# EAGLE board adapter (EAGLE 5.10)
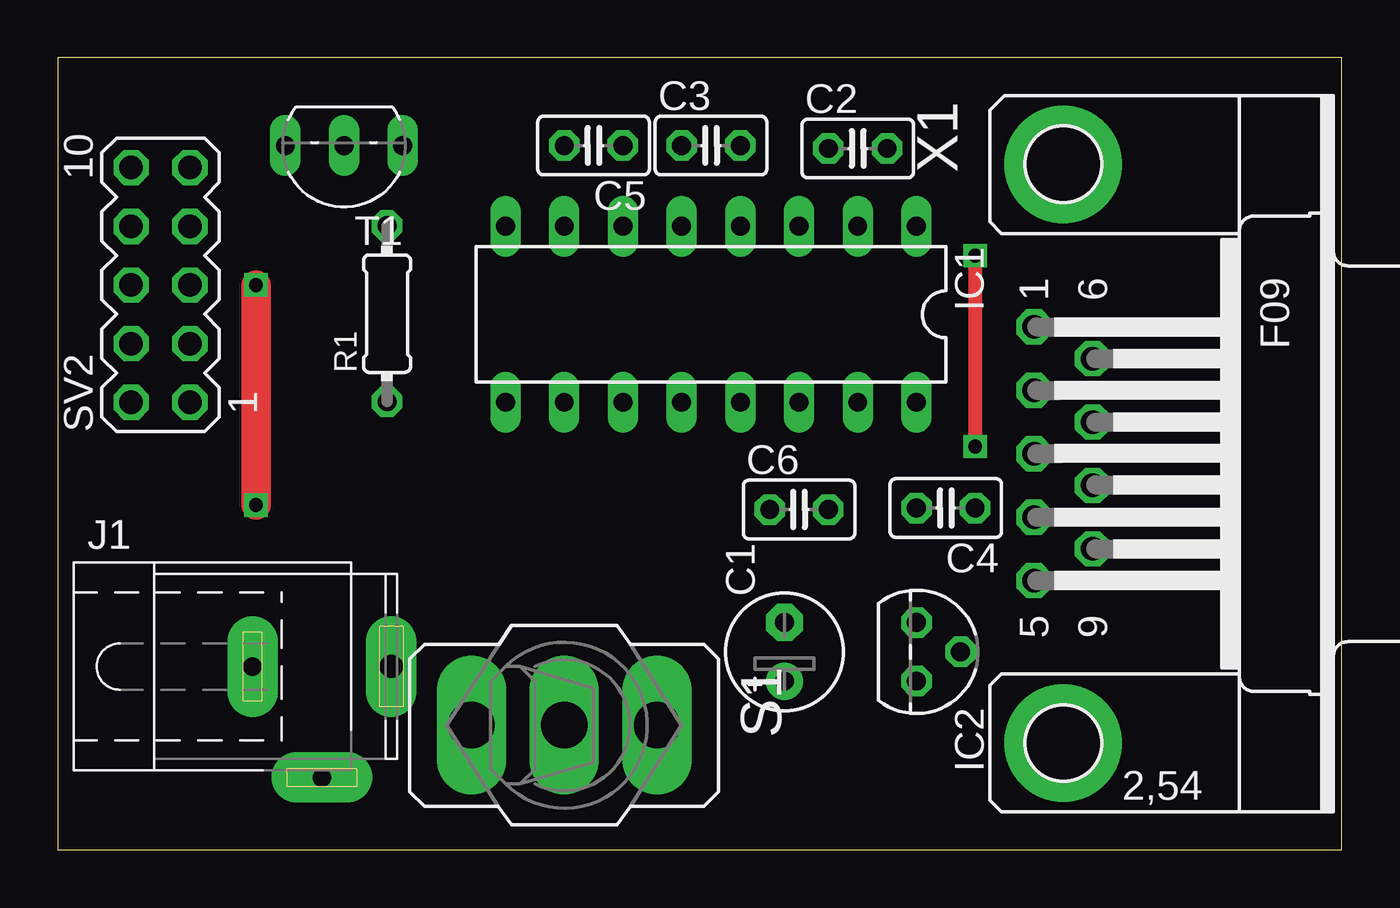
[diagram p0: board, top side]
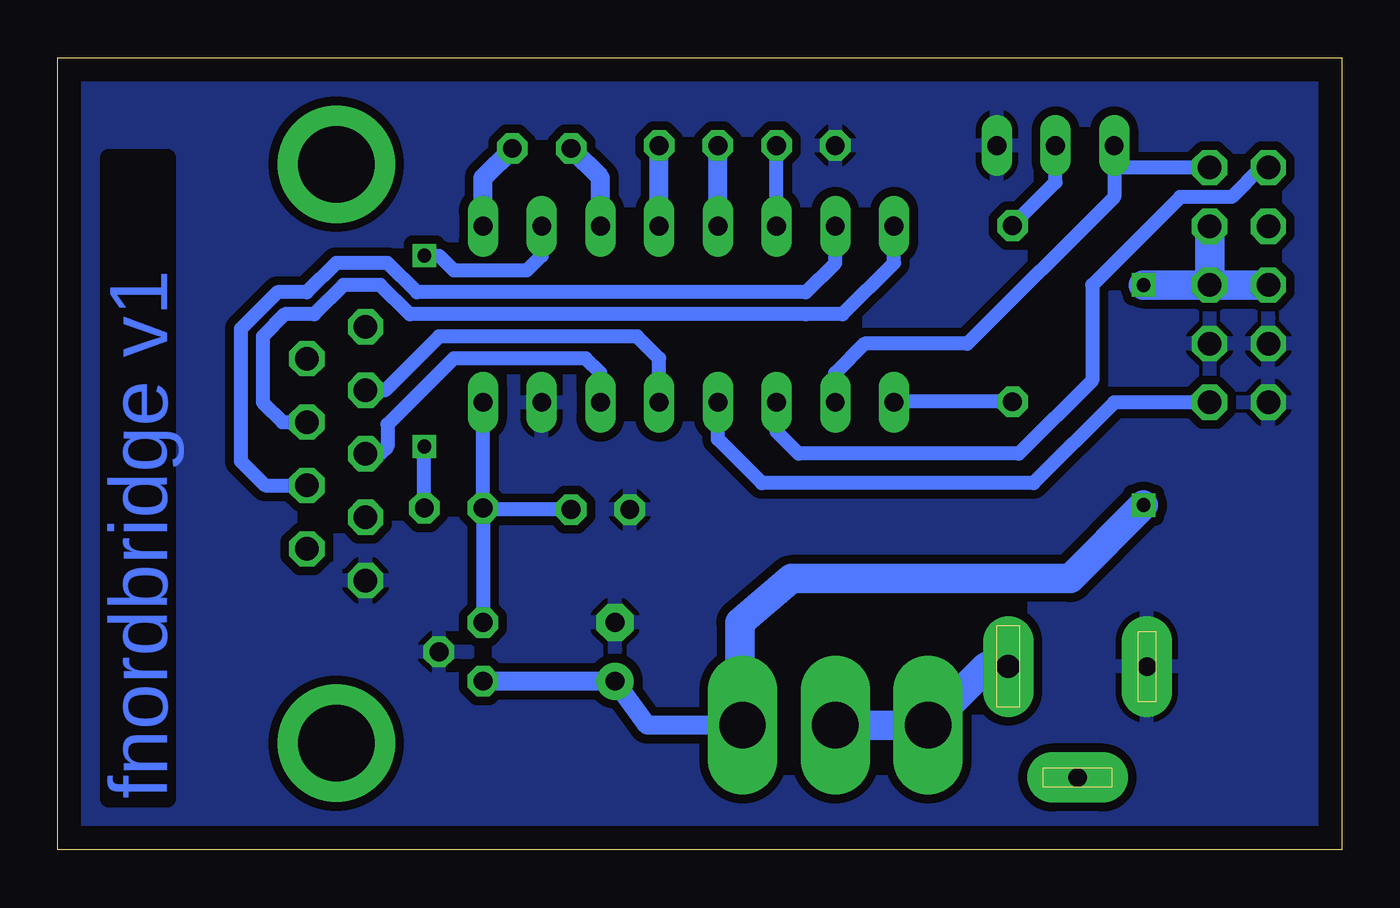
[diagram p1: board, bottom side, seen from below]

Size 55.54 x 34.28 mm. Coordinates in mm from the lower left corner, seen from the top.
Outline: 0,0 55.54,0 55.54,34.28 0,34.28 0,0
Copper layers (1*16): Top 0.035mm / dielectric 1.5mm / Bottom 0.035mm
Design rules "default *": minimum track width 10mil, minimum drill 24mil, track to track 15mil, track to pad 15mil, pad to pad 8mil, via to via 8mil, smd to smd 8mil, copper to edge 40mil, drill to drill 8mil, minimum pad ring 10mil, minimum via ring 8mil, stop-mask expansion 4mil, vias tented up to drill 0mil, thermal gap 10mil

## Footprints (pad centres in the part's own frame; a part is rotated, then mirrored left to right if it is on the bottom)
E2,5-5 = drill 0.813 pad 1.6 round: + -1.27,0 | drill 0.813 pad 1.6 octagon: - 1.27,0
C025-025X050 = drill 0.813 octagon: 1 -1.27,0; 2 1.27,0
DIL16 = drill 0.813 long: 1 -8.89,-3.81; 2 -6.35,-3.81; 3 -3.81,-3.81; 4 -1.27,-3.81; 5 1.27,-3.81; 6 3.81,-3.81; 7 6.35,-3.81; 8 8.89,-3.81; 9 8.89,3.81; 10 6.35,3.81; 11 3.81,3.81; 12 1.27,3.81; 13 -1.27,3.81; 14 -3.81,3.81; 15 -6.35,3.81; 16 -8.89,3.81
TO92 = drill 0.813 octagon: 1 -1.27,0; 2 0,1.905; 3 1.27,0
SPC4077 = drill 0.8 pad 2.184 long: 1 -3,0; 2 0,-4.8 | drill 1 pad 2.184 long: 3 3,0
0204/7 = drill 0.813 octagon: 1 -3.81,0; 2 3.81,0
320-916 = drill 2.007 long: 1 0,4.013; 2 0,0; 3 0,-4.013
MA05-2 = drill 1.016 octagon: 1 -5.08,-1.27; 2 -5.08,1.27; 3 -2.54,-1.27; 4 -2.54,1.27; 5 0,-1.27; 6 0,1.27; 7 2.54,-1.27; 8 2.54,1.27; 9 5.08,-1.27; 10 5.08,1.27
TO92-EBC = drill 0.813 long: B 0,-1.27; C 2.54,-1.27; E -2.54,-1.27
F09HP = drill 1.016 octagon: 1 -5.486,-1.27; 2 -2.743,-1.27; 3 0,-1.27; 4 2.743,-1.27; 5 5.486,-1.27; 6 -4.115,1.27; 7 -1.372,1.27; 8 1.372,1.27; 9 4.115,1.27 | drill 3.302 pad 5.08 round: G1 -12.522,0; G2 12.522,0

## Placement (x,y rotation side)
C1  22uF  [E2,5-5]  31.43,8.57 90 top
C2  100nF  [C025-025X050]  34.61,30.35 0 top
C3  100nF  [C025-025X050]  28.26,30.48 0 top
C4  100nF  [C025-025X050]  38.42,14.8 180 top
C5  100nF  [C025-025X050]  23.18,30.48 180 top
C6  100nF  [C025-025X050]  32.07,14.73 0 top
IC1  MAX232  [DIL16]  28.26,23.18 180 top
IC2  78L05Z  [TO92]  37.15,8.57 270 top
J1  [SPC4077]  11.43,7.94 0 top
R1  [0204/7]  14.24,23.21 90 top
S1  [320-916]  21.91,5.4 270 top
SV2  [MA05-2]  4.44,24.45 90 top
T1  [TO92-EBC]  12.38,29.21 180 top
X1  [F09HP]  43.5,17.14 270 top

## Library data of the parts
C1-C6 R1 = rcl
IC1 = maxim
IC2 = linear
J1 = con-jack
S1 = switch
SV2 = con-lstb
T1 = transistor
X1 = con-subd

## Nets
+12V: C1.+ IC2.3 S1.1 SV2.5 SV2.6 SV2.7
GND: C1.- C5.2 C6.1 IC1.15 IC2.2 J1.1 SV2.2 SV2.3 SV2.4 T1.E X1.5
INT: IC1.10 SV2.9 T1.C
N$1: C3.1 IC1.5
N$2: C2.2 IC1.1
N$3: C4.1 IC1.2
N$4: C5.1 IC1.6
N$5: IC1.11 SV2.10
N$6: IC1.12 SV2.1
N$7: C2.1 IC1.3
N$8: C3.2 IC1.4
N$9: IC1.8 X1.7
N$10: IC1.7 X1.8
N$11: IC1.13 X1.2
N$12: J1.3 S1.2 S1.3
N$13: R1.2 T1.B
N$14: IC1.9 R1.1
N$15: IC1.14 X1.3
VCC: C4.2 C6.2 IC1.16 IC2.1

## Tracks (layer width: path | path; a pad name or v marks a point on that pad's centre or on a via)
+12V  (via drill 0.6)
  Top 1.27: v8.57,14.92 v8.57,24.45
  Bottom 0.813: S1.1 30.05,5.4 C1.+ IC2.3
  Bottom 1.27: SV2.5 SV2.6 | SV2.5 SV2.7 | v8.57,24.45 SV2.5 | v8.57,14.92 11.75,11.75 23.81,11.75 26.03,9.84 26.03,5.51 S1.1
GND
  Bottom 0.61: C6.1 30.67,14.61
  pour Bottom: -0.95,34.61 55.56,34.61 55.56,0.32 -0.95,0.32
INT
  Bottom 0.61: SV2.9 9.84,29.53 | 9.84,29.53 T1.C | 9.84,29.53 9.84,28.26 16.19,21.91 20.64,21.91 21.91,20.64 IC1.10
N$1
  Bottom 0.813: IC1.5 C3.1
N$2
  Bottom 0.813: IC1.1 37.15,29.08 C2.2
N$3  (via drill 0.6)
  Top 0.61: v39.69,17.46 v39.69,25.72
  Bottom 0.61: IC1.2 34.61,25.72 35.24,25.08 38.42,25.08 39.05,25.72 v39.69,25.72 | C4.1 v39.69,17.46
N$4
  Bottom 0.61: IC1.6 C5.1
N$5
  Bottom 0.61: SV2.10 3.49,29.53 4.76,28.26 6.99,28.26 10.8,24.45 10.8,20.32 13.97,17.14 23.5,17.14 24.45,18.1 IC1.11
N$6
  Bottom 0.61: SV2.1 9.84,19.37 13.33,15.88 25.08,15.88 26.99,17.78 IC1.12
N$7
  Bottom 0.813: IC1.3 32.07,29.08 C2.1
N$8
  Bottom 0.813: IC1.4 C3.2
N$9
  Bottom 0.61: X1.7 45.82,18.52 46.67,19.37 46.67,22.23 45.72,23.18 44.45,23.18 43.18,24.45 41.59,24.45 40.32,23.18 23.18,23.18 21.59,23.18 19.37,25.4 IC1.8
N$10
  Bottom 0.61: X1.8 46.57,15.77 47.63,16.83 47.63,22.54 46.04,24.13 44.77,24.13 43.5,25.4 41.28,25.4 40,24.13 23.18,24.13 21.91,25.4 IC1.7
N$11
  Bottom 0.61: X1.2 41.39,19.89 39.05,22.23 30.48,22.23 29.53,21.27 IC1.13
N$12
  Bottom 1.27: J1.3 15.35,7.94 S1.3 S1.2
N$13
  Bottom 0.61: R1.2 14.26,27.02 12.38,28.89 12.34,30.43 T1.B
N$14
  Bottom 0.61: R1.1 19.4,19.4 IC1.9
N$15
  Bottom 0.61: IC1.14 32.07,20.64 32.7,21.27 38.1,21.27 38.42,21.27 41.28,18.42 41.28,17.46 41.59,17.14 X1.3
VCC
  Bottom 0.61: C4.2 IC1.16 | C4.2 IC2.1 | C6.2 37.08,14.73 C4.2

## Text on the board
Bottom: fnordbridge v1